# EAGLE board mainModule (EAGLE 6.1)

Size 160 x 100 mm. Coordinates in mm from the lower left corner, seen from the top.
Outline: 0,0 160,0 160,100 0,100 0,0
Copper layers (1*16): Top 0.035mm / dielectric 1.5mm / Bottom 0.035mm
Design rules: minimum track width 10mil, minimum drill 24mil, track to track 8mil, track to pad 8mil, pad to pad 8mil, via to via 8mil, smd to smd 8mil, copper to edge 40mil, drill to drill 8mil, minimum pad ring 10mil, minimum via ring 8mil, stop-mask expansion 4mil, vias tented up to drill 0mil, thermal gap 10mil

## Footprints (pad centres in the part's own frame; a part is rotated, then mirrored left to right if it is on the bottom)
153CLV-0405 = smd 2.6 x 1.6: + 1.8,0; - -1.8,0
PANASONIC_C = smd 2.6 x 1.4: + 2.05,0; - -2.05,0
SMC_A = smd 1.6 x 1.4: + -1.5,0; - 1.5,0
R/2012-12W = smd 1.75 x 1.26: + 1.275,0; - -1.275,0
DO35-7 = drill 0.813 long: A 3.81,0; C -3.81,0
SM-Z15 = smd 1 x 2: 1 -4,2.1; 2 4,-2.1
R2010 = smd 1.8 x 2.7: 1 -2.2,0; 2 2.2,0
SOP65P490X109-8N = smd 1.372 x 0.457: 1 -2.21,0.965; 2 -2.21,0.33; 3 -2.21,-0.33; 4 -2.21,-0.965; 5 2.21,-0.965; 6 2.21,-0.33; 7 2.21,0.33; 8 2.21,0.965
KK-156-4 = drill 1.7 pad 2.184 long: 1 -5.94,0; 2 -1.98,0; 3 1.98,0; 4 5.94,0
5566-2 = drill 1.4 square: 1 0,-2.75; 2 0,2.75 | hole 3: 4.7,2.29; -4.7,2.29

## Placement (x,y rotation side)
C1  1uF, 100V  [153CLV-0405]  -36.83,5.08 0 top  (outside the outline)
C2  15uF, 25V  [PANASONIC_C]  -17.78,15.24 0 top  (outside the outline)
C3  100nF, 50V  [SMC_A]  -39.37,38.1 0 top  (outside the outline)
C4  10nF, 50V  [R/2012-12W]  -20.32,38.1 0 top  (outside the outline)
C5  100nF, 100V  [SMC_A]  -30.48,38.1 0 top  (outside the outline)
D1  1N4148DO35-7  [DO35-7]  -34.29,31.75 0 top  (outside the outline)
L1  100uH  [SM-Z15]  -17.78,31.75 0 top  (outside the outline)
R1  200K  [R2010]  -25.4,13.97 0 top  (outside the outline)
R2  100K  [R2010]  -33.02,13.97 0 top  (outside the outline)
R3  1K  [R2010]  -16.51,24.13 0 top  (outside the outline)
R4  1K  [R2010]  -24.13,24.13 0 top  (outside the outline)
R5  1ohm  [R2010]  -31.75,24.13 0 top  (outside the outline)
U1  LM5007MM  [SOP65P490X109-8N]  -24.13,5.08 0 top  (outside the outline)
X1  [KK-156-4]  -30.48,-5.08 0 top  (outside the outline)
X2  5566-2  [5566-2]  -48.26,-2.54 0 top  (outside the outline)

## Library data of the parts
C1-C5 = resistor
D1 = diode
L1 = inductor-neosid; OC_FARNELL: unknown; OC_NEWARK: unknown
R1-R5 = rcl
U1 = LM5007; MPN: LM5007MM; OC_FARNELL: 9779345; OC_NEWARK: 97K3542; PACKAGE: SOP-8; SUPPLIER: TEXAS INSTRUMENTS
X1 = con-molex; OC_FARNELL: unknown; OC_NEWARK: unknown
X2 = con-molex; OC_FARNELL: 1822072; OC_NEWARK: unknown

## Nets
GND: C1.- C2.- C3.- C5.- D1.A R2.1 R4.1 U1.4 X2.1
N$1: R2.2 U1.3
N$3: R1.1 U1.6
N$5: C4.+ U1.2
N$6: C4.- D1.C L1.1 U1.1
N$7: C3.+ U1.7
N$8: R3.1 R4.2 U1.5
N$9: C2.+ R5.1
VIN(12-75V): C1.+ C5.+ R1.2 U1.8 X2.2
VOUT(5V): L1.2 R3.2 R5.2

## Tracks (layer width: path | path; a pad name or v marks a point on that pad's centre or on a via)
GND  (8 unrouted)
N$1  (1 unrouted)
N$3  (1 unrouted)
N$5  (1 unrouted)
N$6  (3 unrouted)
N$7  (1 unrouted)
N$8  (2 unrouted)
N$9  (1 unrouted)
VIN(12-75V)  (4 unrouted)
VOUT(5V)  (2 unrouted)